# EAGLE board obstacle avoiding PCB (EAGLE 9.7.0)
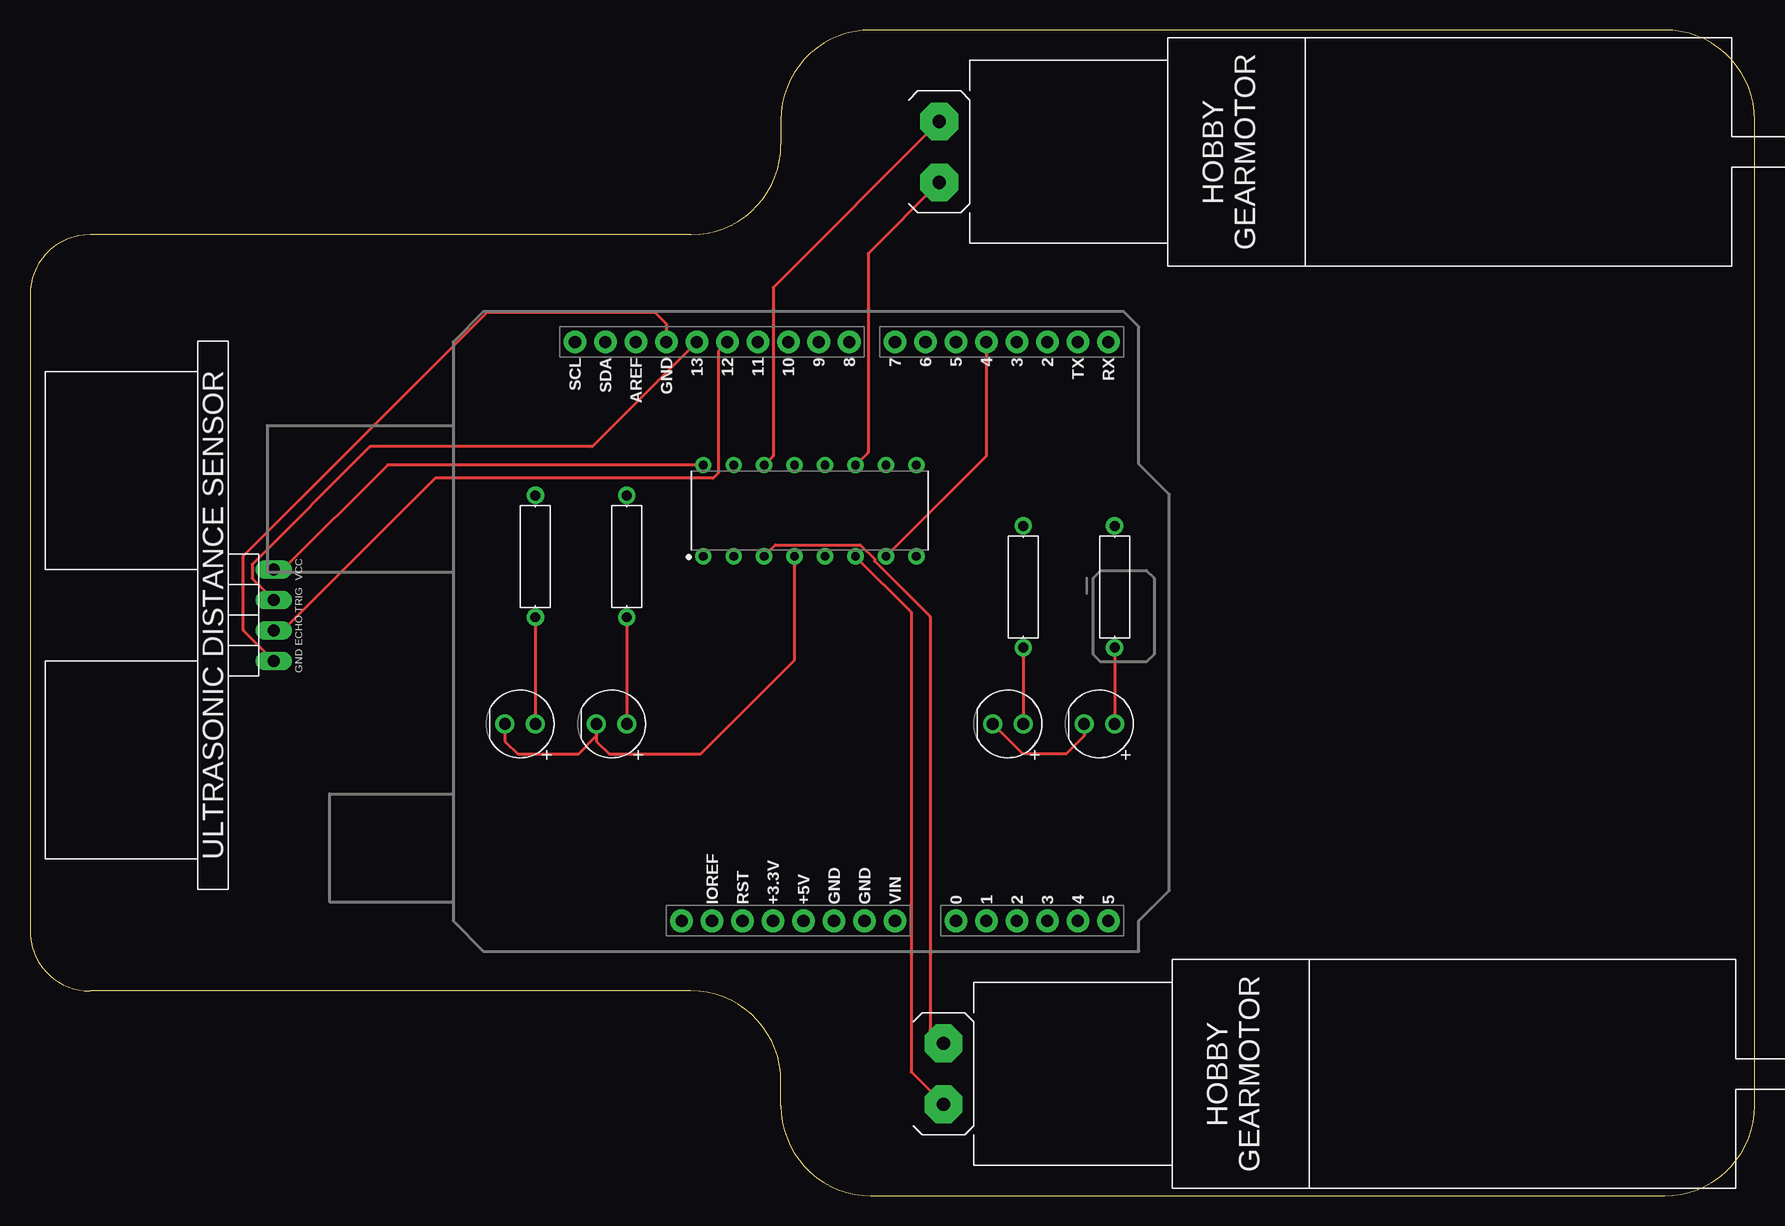
[diagram p0: board, top side]
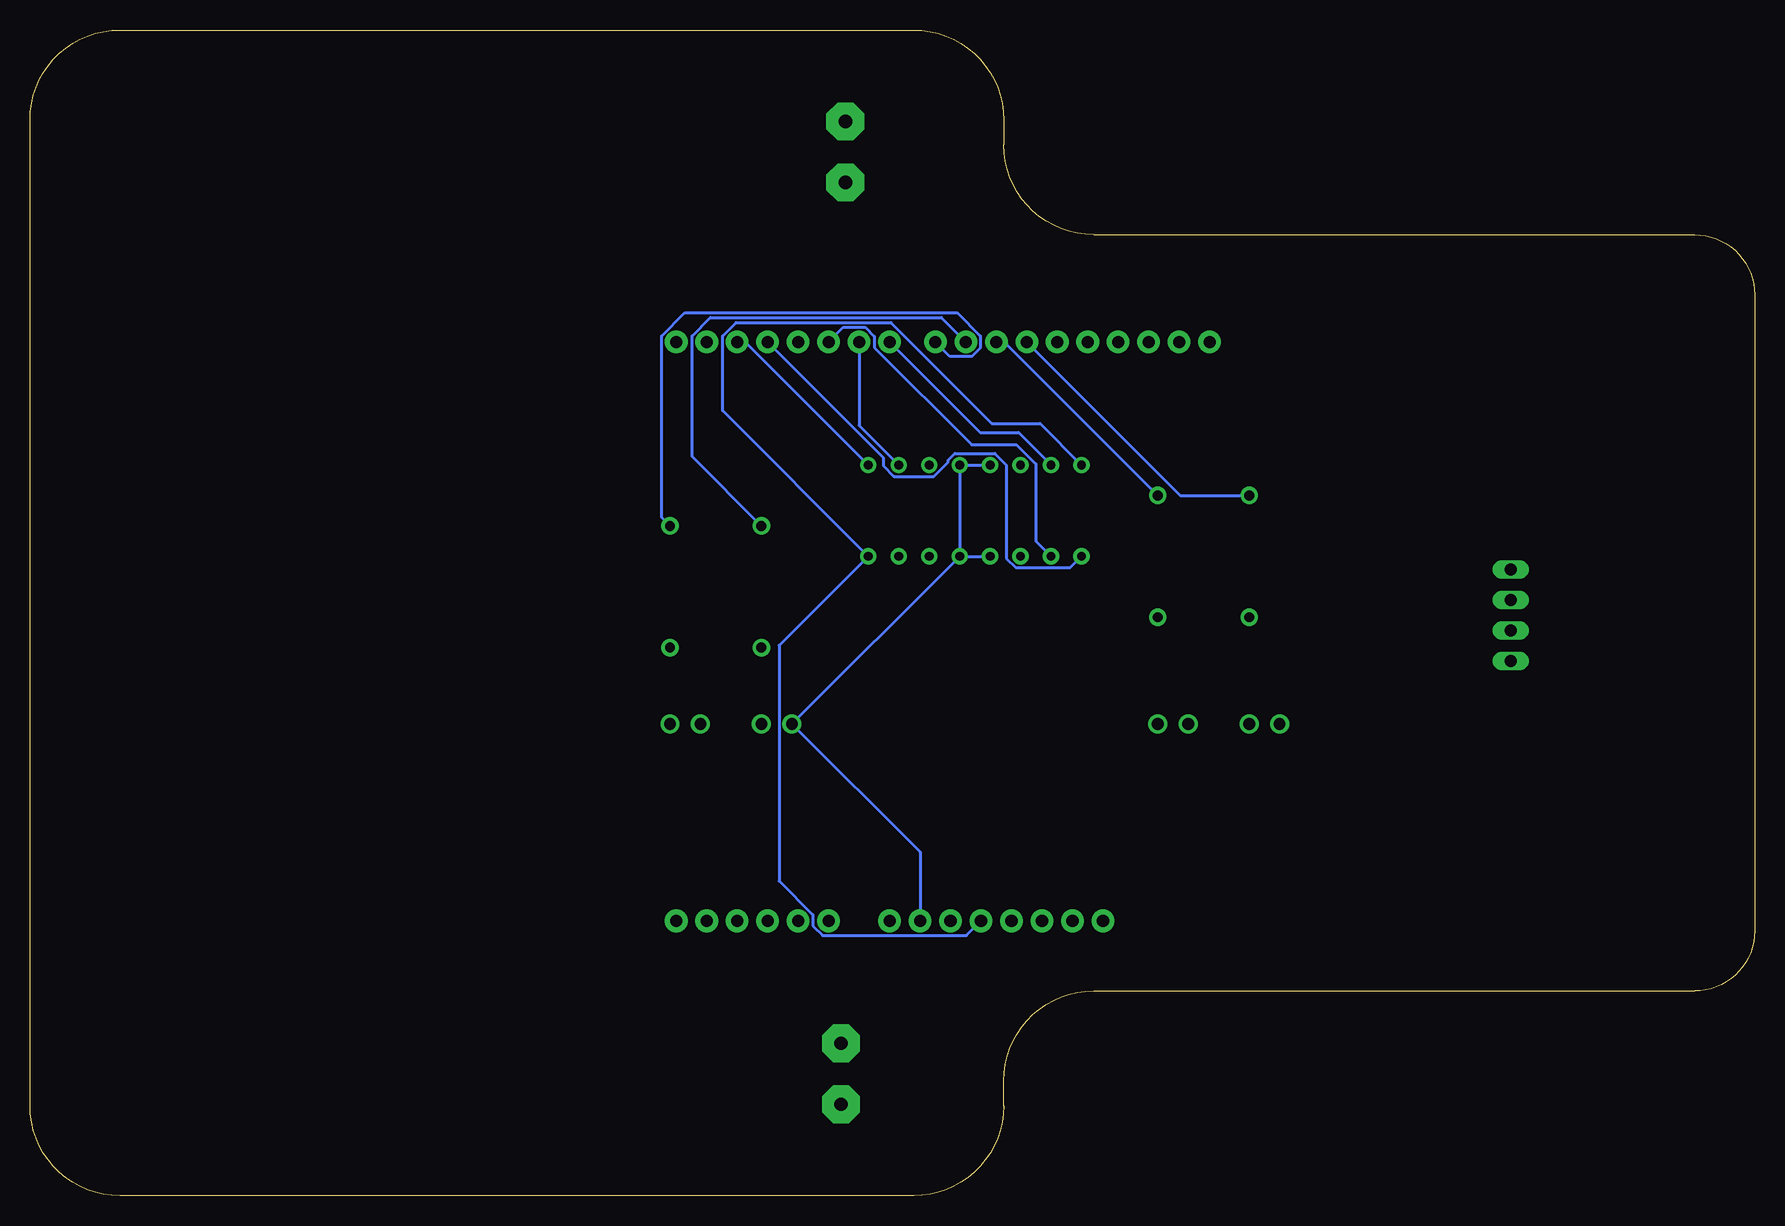
[diagram p1: board, bottom side, seen from below]

Size 143.72 x 97.18 mm. Coordinates in mm from the lower left corner, seen from the top.
Outline: 62.58,7.5 arc90 70.08,0 136.22,0 arc90 143.72,7.5 143.72,89.68 arc90 136.22,97.18 70.08,97.18 arc90 62.58,89.68 62.58,87.62 arc-90 55.08,80.12 5,80.12 arc90 0,75.12 0,22.07 arc90 5,17.07 55.08,17.07 arc-90 62.58,9.57 62.58,7.5
Copper layers (1*16): Top 0.035mm / dielectric 1.5mm / Bottom 0.035mm
Design rules "default": minimum track width 6mil, minimum drill 0.35mm, track to track 6mil, track to pad 6mil, pad to pad 6mil, via to via 6mil, smd to smd 6mil, copper to edge 40mil, drill to drill 6mil, minimum pad ring 10mil, minimum via ring 8mil, stop-mask expansion 4mil, vias tented up to drill 0mil, thermal gap 10mil

## Footprints (pad centres in the part's own frame; a part is rotated, then mirrored left to right if it is on the bottom)
LEDRD254W60D565H860B = drill 0.981 pad 1.581: 1 -1.27,0; 2 1.27,0
HC-SR04 = drill 1.016 long: 1 -3.81,0; 2 -1.27,0; 3 1.27,0; 4 3.81,0
DG01D = drill 1.118 pad 3.15 octagon: + 2.54,0; - -2.54,0
RESAD1016W63L850D250B = drill 0.83 pad 1.43: 1 -5.08,0; 2 5.08,0
ARDUINO-UNO-R3-SHIELD = drill 1.016 pad 1.88: 3.3V 24.13,-2.54; 5V 24.13,0; A0 24.13,12.7; A1 24.13,15.24; A2 24.13,17.78; A3 24.13,20.32; A4 24.13,22.86; A5 24.13,25.4; AREF -24.13,-13.97; D2 -24.13,20.32; D3 -24.13,17.78; D4 -24.13,15.24; D5 -24.13,12.7; D6 -24.13,10.16; D7 -24.13,7.62; D8 -24.13,3.81; D9 -24.13,1.27; D10 -24.13,-1.27; D11 -24.13,-3.81; D12 -24.13,-6.35; D13 -24.13,-8.89; GND@0 24.13,2.54; GND@1 24.13,5.08; GND@2 -24.13,-11.43; IOREF 24.13,-7.62; NC 24.13,-10.16; RES 24.13,-5.08; RX -24.13,25.4; SCL -24.13,-19.05; SDA -24.13,-16.51; TX -24.13,22.86; VIN 24.13,7.62
DIP762W53P254L1969H508Q16B = drill 0.743 pad 1.343: 1 -3.81,8.89; 2 -3.81,6.35; 3 -3.81,3.81; 4 -3.81,1.27; 5 -3.81,-1.27; 6 -3.81,-3.81; 7 -3.81,-6.35; 8 -3.81,-8.89; 9 3.81,-8.89; 10 3.81,-6.35; 11 3.81,-3.81; 12 3.81,-1.27; 13 3.81,1.27; 14 3.81,3.81; 15 3.81,6.35; 16 3.81,8.89

## Placement (x,y rotation side)
D1  RED  [LEDRD254W60D565H860B]  40.85,39.33 180 top
D2  RED  [LEDRD254W60D565H860B]  81.49,39.33 180 top
D3  RED  [LEDRD254W60D565H860B]  89.11,39.33 180 top
D4  RED  [LEDRD254W60D565H860B]  48.47,39.33 180 top
DIST1  DISTANCE-SENSOR-4PINHC-SR04  [HC-SR04]  20.32,48.4 270 top
M1  MOTOR_DG01D  [DG01D]  75.77,87.02 90 top
M2  MOTOR_DG01D  [DG01D]  76.13,10.16 90 top
R1  220  [RESAD1016W63L850D250B]  42.12,53.3 90 top
R2  220  [RESAD1016W63L850D250B]  49.74,53.3 90 top
R3  220  [RESAD1016W63L850D250B]  82.76,50.76 90 top
R4  220  [RESAD1016W63L850D250B]  90.38,50.76 90 top
U1  ARDUINO-UNO-R3-SHIELD  [ARDUINO-UNO-R3-SHIELD]  64.46,47.04 270 top
U2  L293E  [DIP762W53P254L1969H508Q16B]  64.98,57.11 90 top

## Library data of the parts
D1-D4 = Tinkercad; CATEGORY: Opto-Electronic; SUB-CATEGORY: LED; VALUE: LED_RED
DIST1 M1 M2 R1-R4 U1 U2 = Tinkercad

## Nets
D1_A: D1.1 R1.1
D2_A: D2.1 R3.1
D3_A: D3.1 R4.1
D4_A: D4.1 R2.1
M1_+: M1.+ U2.14
M1_-: M1.- U2.11
M2_+: M2.+ U2.3
M2_-: M2.- U2.6
S$1: DIST1.4 U1.GND@2
U1_5V: DIST1.1 U1.5V U2.8 U2.16
U1_D2: U1.D2 U2.9
U1_D3: U1.D3 U2.1
U1_D4: U1.D4 U2.7
U1_D5: U1.D5 U2.2
U1_D6: U1.D6 U2.10
U1_D7: U1.D7 U2.15
U1_D8: R4.2 U1.D8
U1_D9: R3.2 U1.D9
U1_D10: R2.2 U1.D10
U1_D11: R1.2 U1.D11
U1_D12: DIST1.3 U1.D12
U1_D13: DIST1.2 U1.D13
U1_GND: D1.2 D2.2 D3.2 D4.2 U1.GND@1 U2.4 U2.5 U2.12 U2.13

## Tracks (layer width: path | path; a pad name or v marks a point on that pad's centre or on a via)
D1_A
  Top 0.254: R1.1 D1.1
D2_A
  Top 0.254: R3.1 D2.1
D3_A
  Top 0.254: R4.1 D3.1
D4_A
  Top 0.254: R2.1 D4.1
M1_+
  Top 0.254: M1.+ 61.92,75.71 61.92,61.67 U2.14
M1_-
  Top 0.254: M1.- 69.84,78.55 69.84,61.97 U2.11
M2_+
  Top 0.254: U2.3 62.12,54.26 69.19,54.26 70.38,53.06 70.38,52.91 75.01,48.28 75.01,13.81 M2.+
M2_-
  Top 0.254: U2.6 73.43,48.66 73.43,10.31 M2.-
S$1
  Top 0.254: DIST1.4 17.78,47.13 17.78,53.34 38.1,73.66 52.07,73.66 53.03,72.7 U1.GND@2
U1_5V
  Top 0.254: U2.16 29.8,60.92 21.08,52.21 DIST1.1
  Bottom 0.254: U1.5V 65.68,21.69 77.66,21.69 78.48,22.51 78.48,23.42 81.29,26.23 81.29,45.88 U2.8 86,65.43 86,71.68 84.88,72.8 71.98,72.8 63.56,64.38 59.55,64.38 U2.16
U1_D2
  Bottom 0.254: U1.D2 84.12,71.17 U2.9
U1_D3
  Bottom 0.254: U1.D3 72.6,61.53 72.6,60.85 71.73,59.97 68.4,59.97 67.2,61.17 67.2,61.32 66.65,61.88 63.32,61.88 62.35,60.9 62.35,53.13 61.57,52.35 57.04,52.35 U2.1
U1_D4
  Top 0.254: U1.D4 79.7,61.67 U2.7
U1_D5
  Bottom 0.254: U1.D5 75.94,72.39 74.11,72.39 73.35,71.63 73.35,70.72 65.24,62.61 61.51,62.61 59.9,61 59.9,54.57 U2.2
U1_D6
  Bottom 0.254: U1.D6 74.62,64.21 U2.10
U1_D7
  Bottom 0.254: U1.D7 64.54,63.63 61.34,63.63 U2.15
U1_D8
  Bottom 0.254: R4.2 91.08,56.54 91.08,71.68 89.15,73.61 66.44,73.61 64.51,71.68 64.51,70.67 65.22,69.95 67.05,69.95 U1.D8
U1_D9
  Bottom 0.254: R3.2 88.54,61.62 88.54,71.68 87.01,73.2 67.76,73.2 U1.D9
U1_D10
  Bottom 0.254: U1.D10 62.53,71.17 R2.2
U1_D11
  Bottom 0.254: U1.D11 47.86,58.38 R1.2
U1_D12
  Top 0.254: U1.D12 57.36,70.42 57.36,60.26 56.93,59.83 33.78,59.83 21.08,47.13 DIST1.3
U1_D13
  Top 0.254: U1.D13 46.84,62.44 28.32,62.44 18.52,52.64 18.52,51.47 DIST1.2
U1_GND
  Top 0.254: U2.4 63.71,44.66 55.88,36.83 48.26,36.83 47.2,37.89 D4.2 47.2,38.31 45.72,36.83 40.64,36.83 39.58,37.89 D1.2 | D3.2 87.84,38.31 86.36,36.83 82.73,36.83 D2.2
  Bottom 0.254: U2.13 U2.12 U2.5 | U2.5 D2.2 69.54,28.65 U1.GND@1 | U2.5 U2.4